# Altium PCB AMDDSP.PcbDoc (part 1 of 3)
Units mil, origin at the board's own origin, x right, y up, seen from the top; angles counter-clockwise.
Board outline 4736.22 x 5330.71 mil, 4 copper layers (Top Layer, GND, PWR, Bottom Layer); 286 components, 168 nets, 1027 pads, 408 vias.
Unrouted connection lines stored in the file: 126.
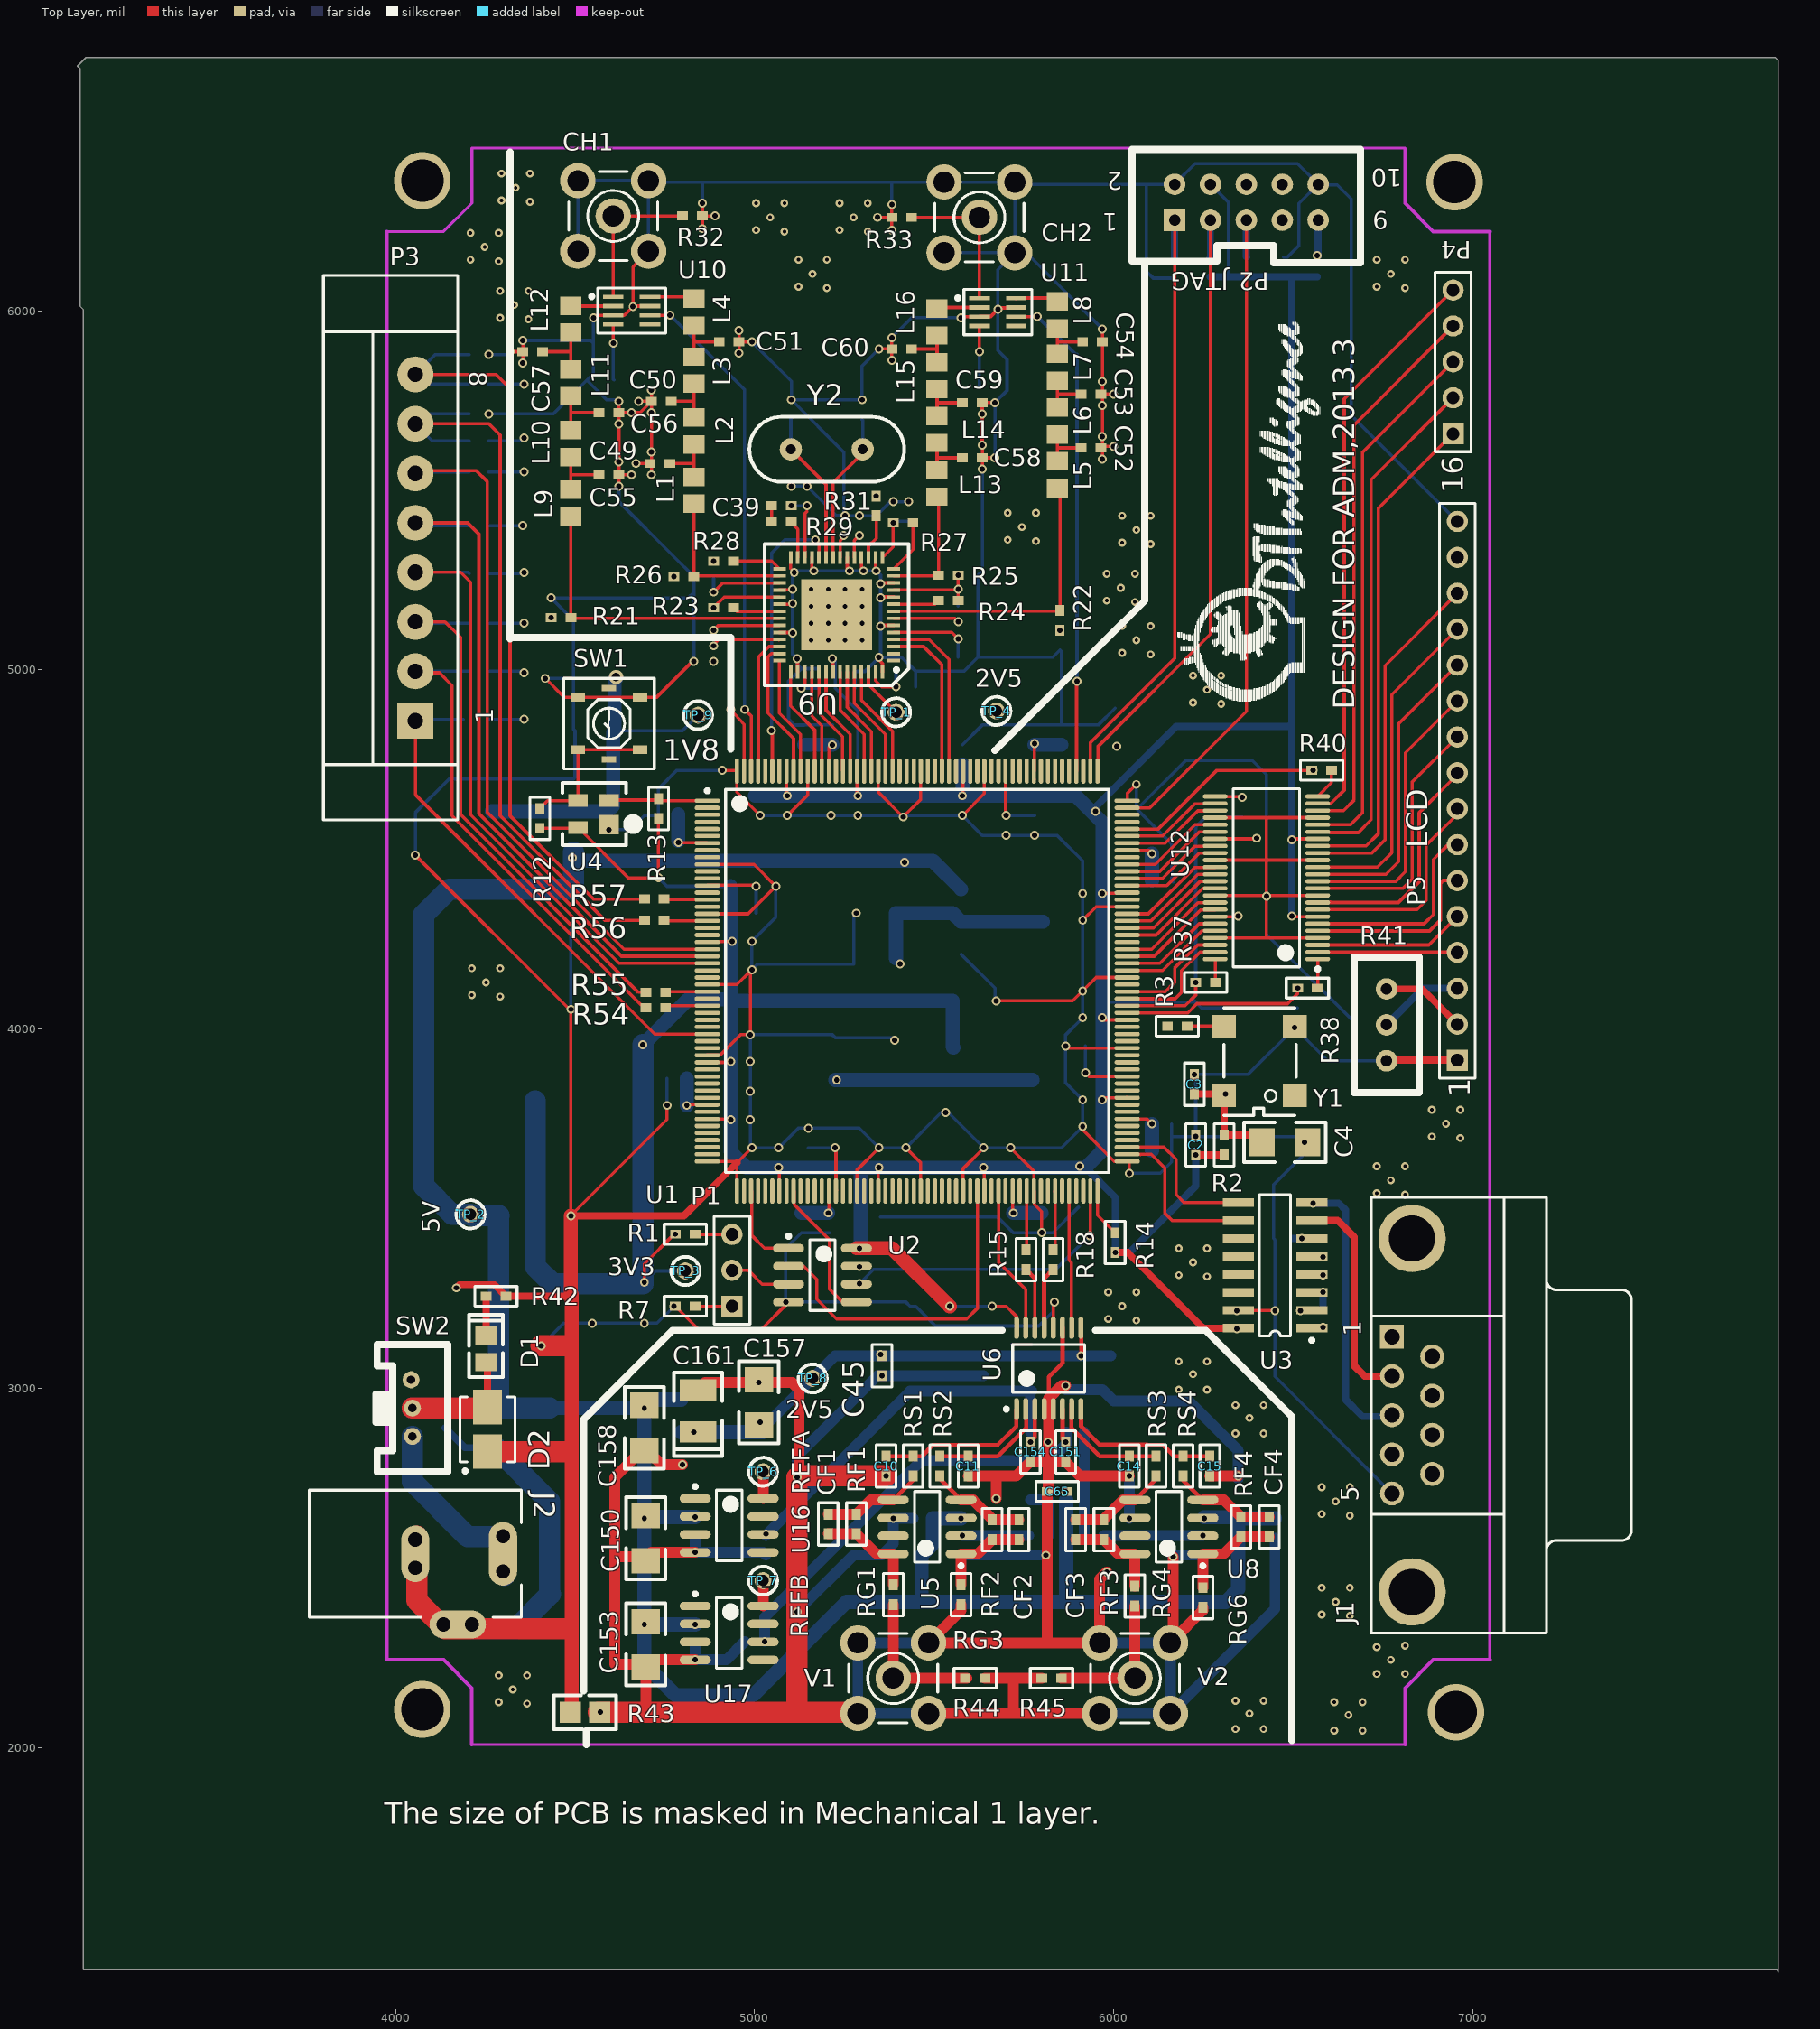
[diagram p0: Top Layer view]
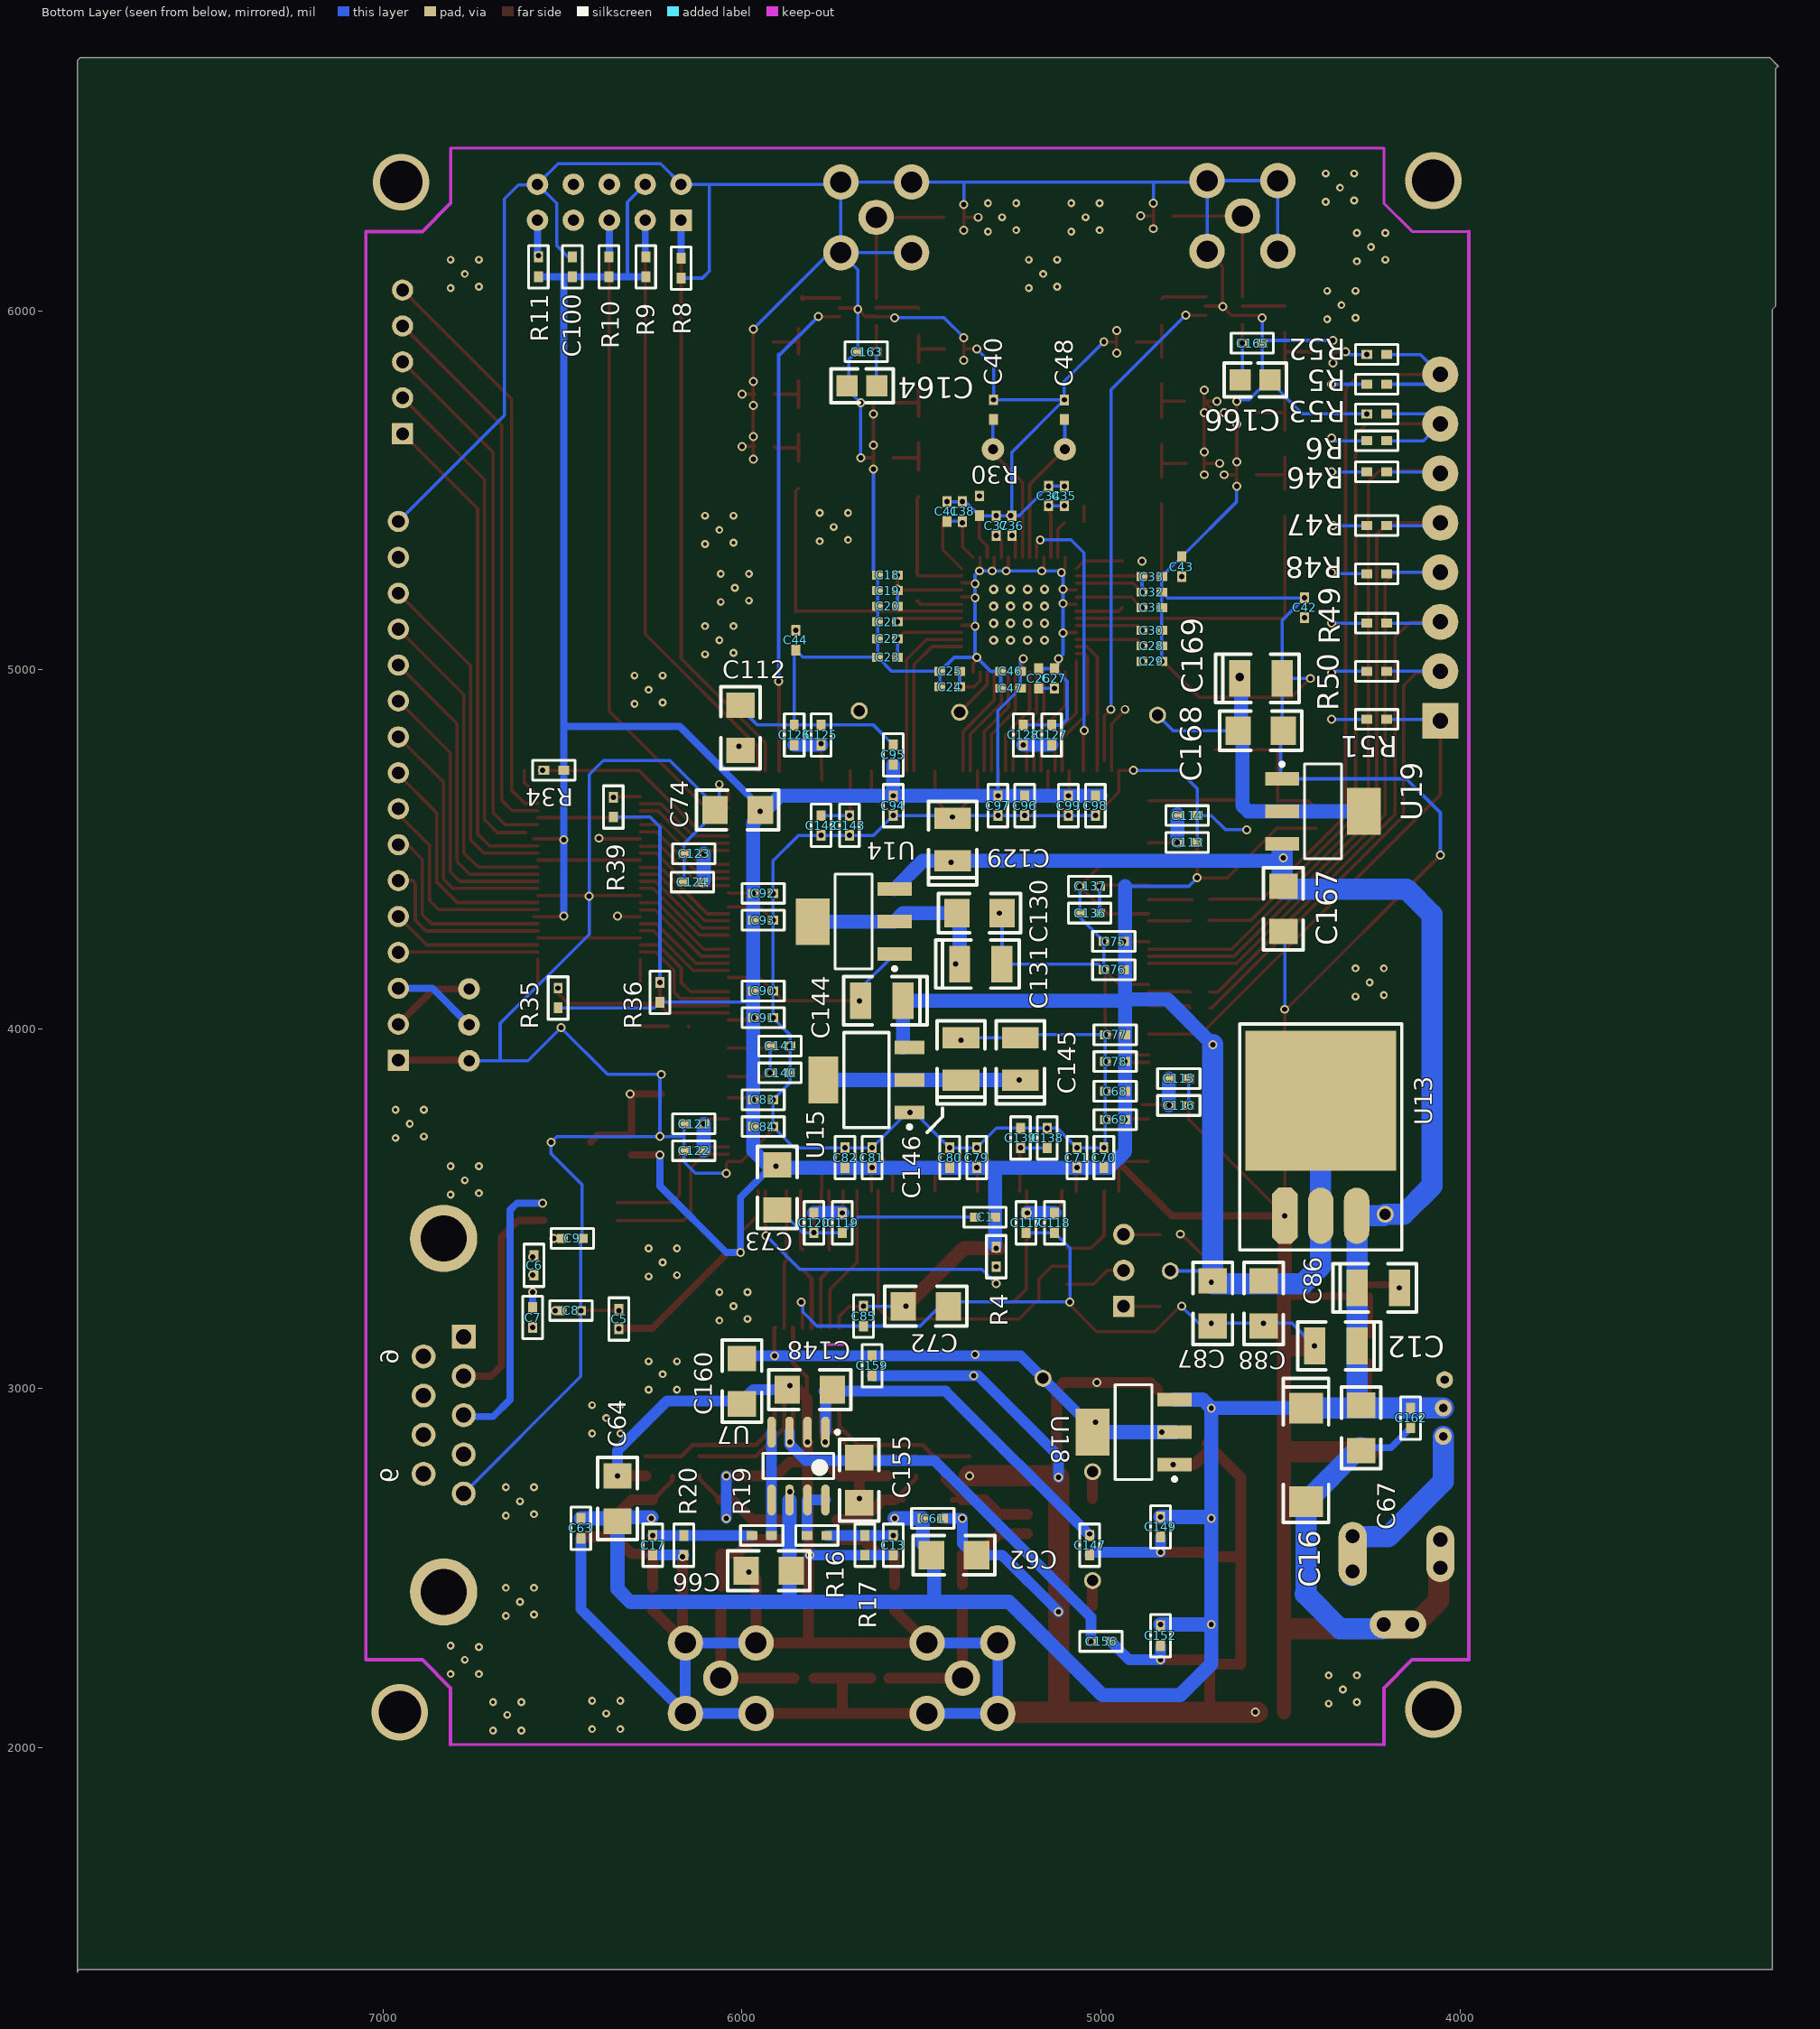
[diagram p1: Bottom Layer view, seen from below]
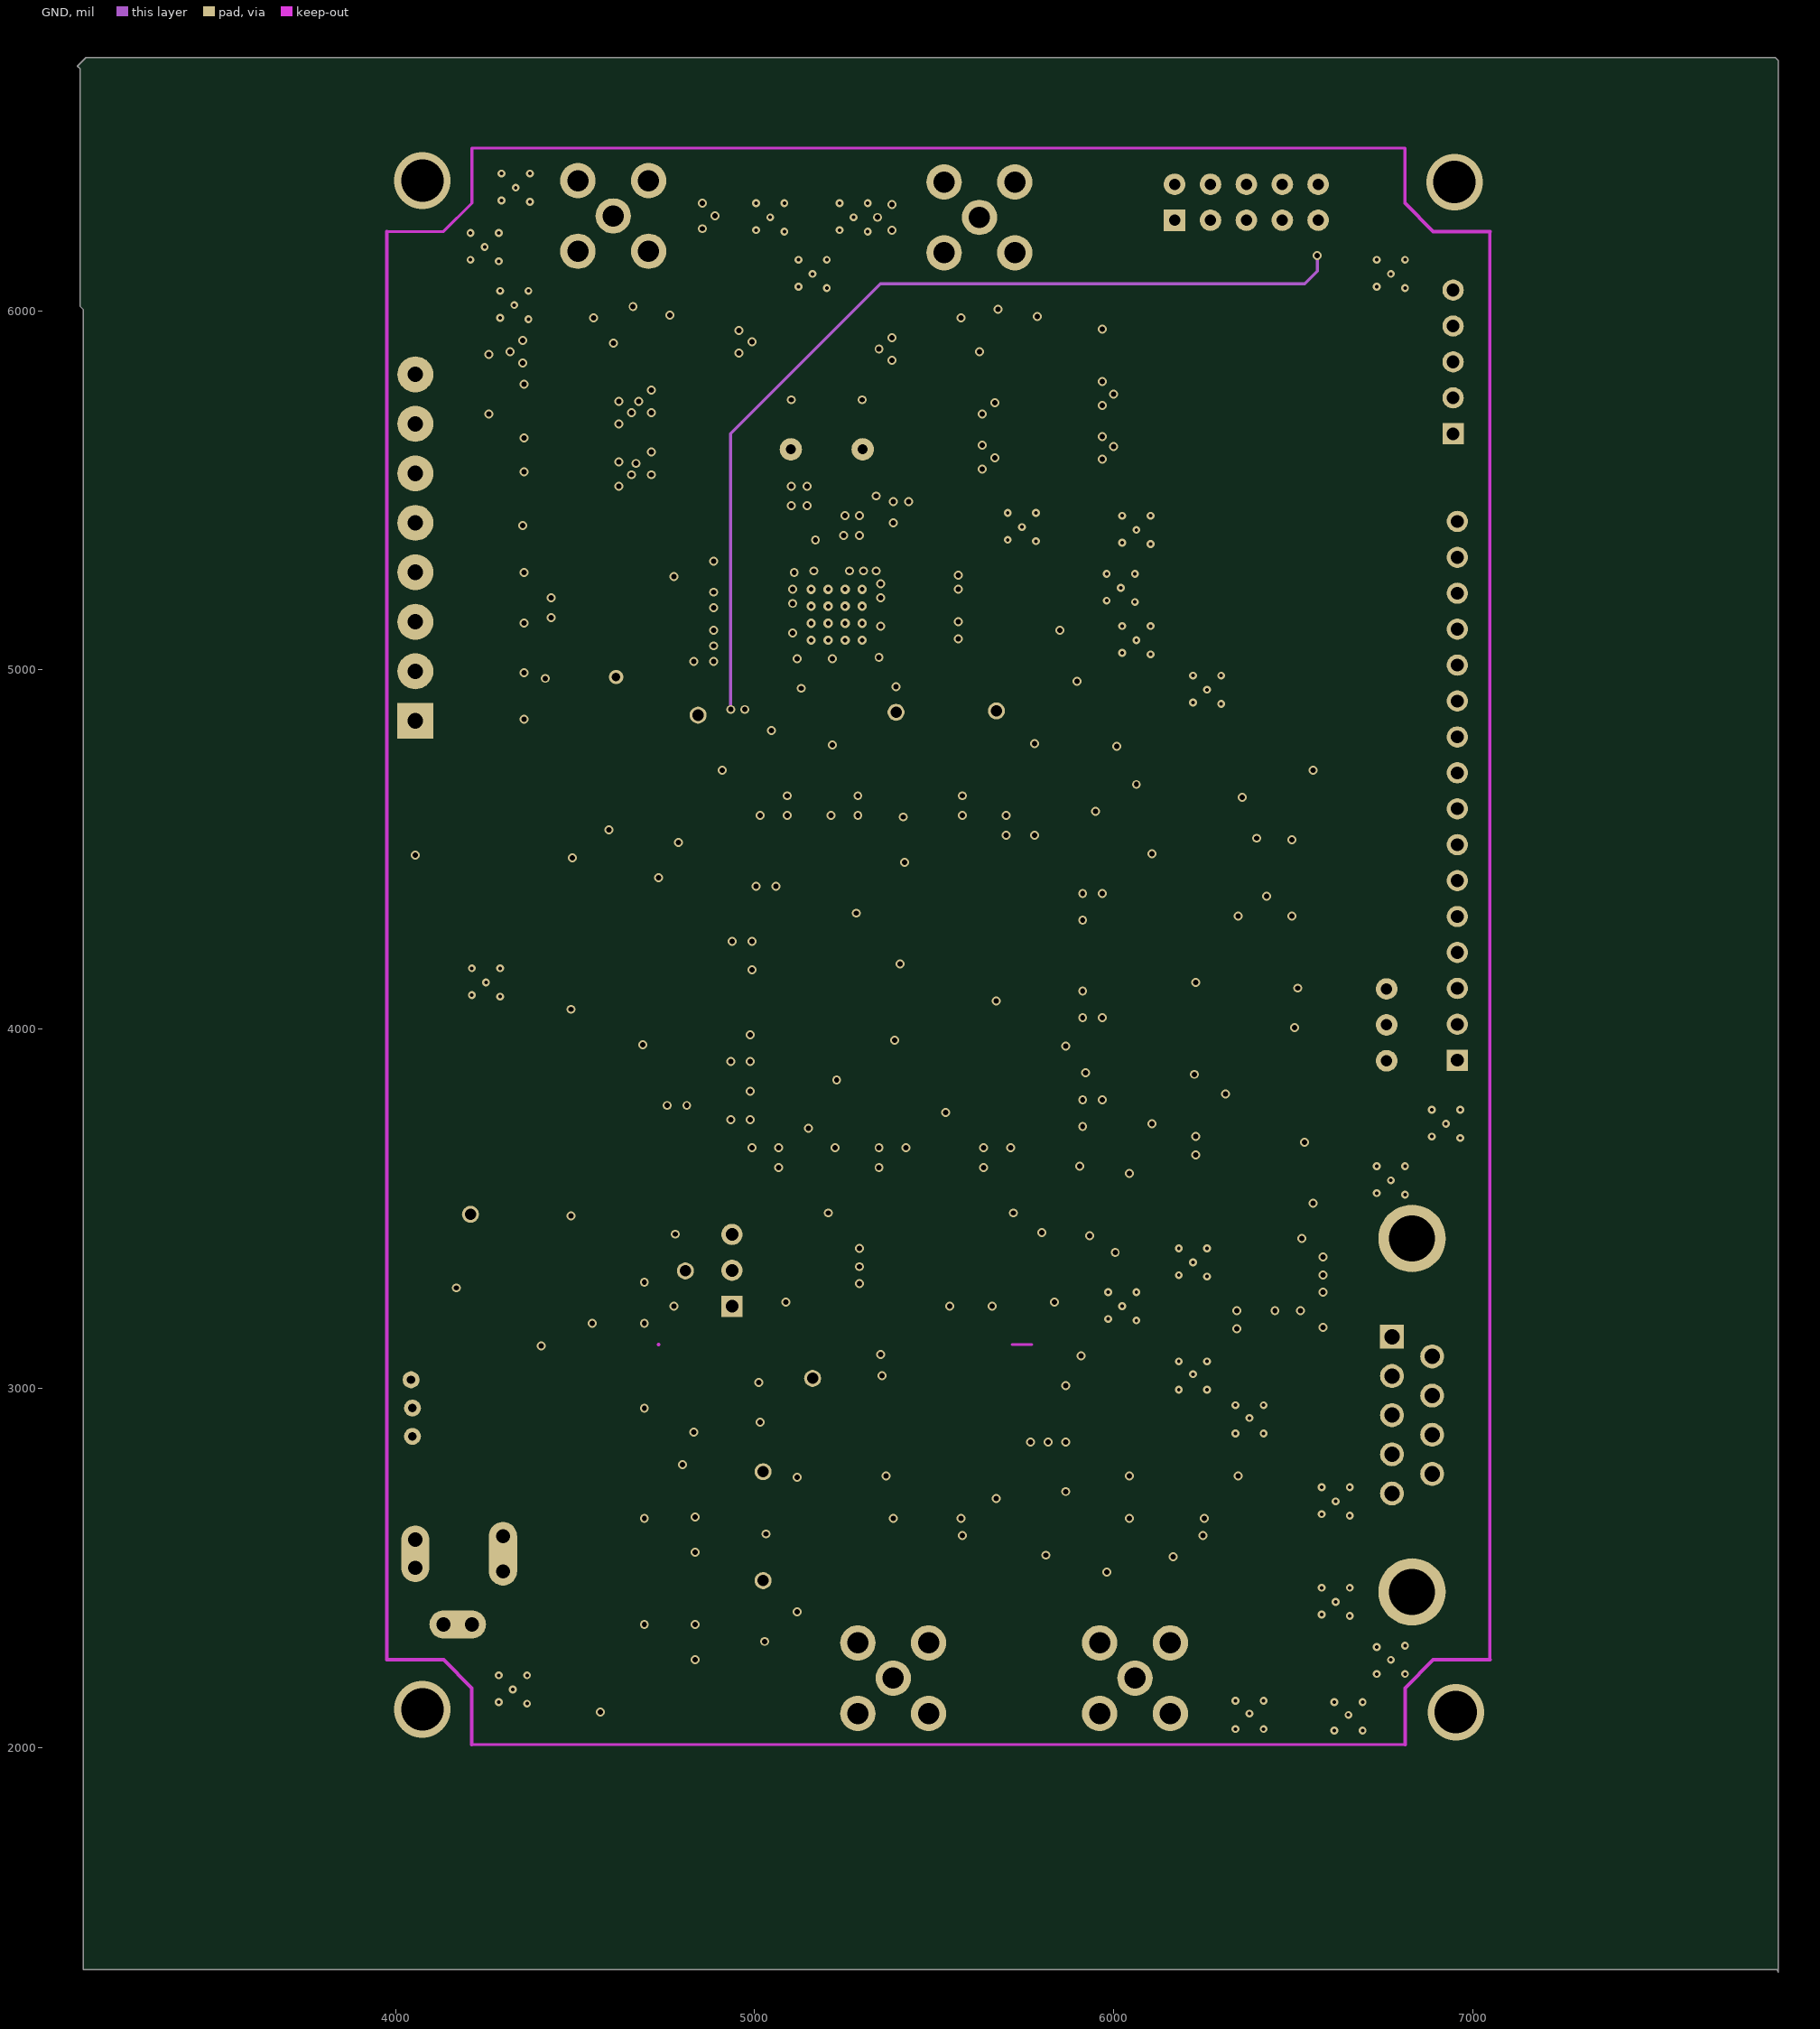
[diagram p2: GND]
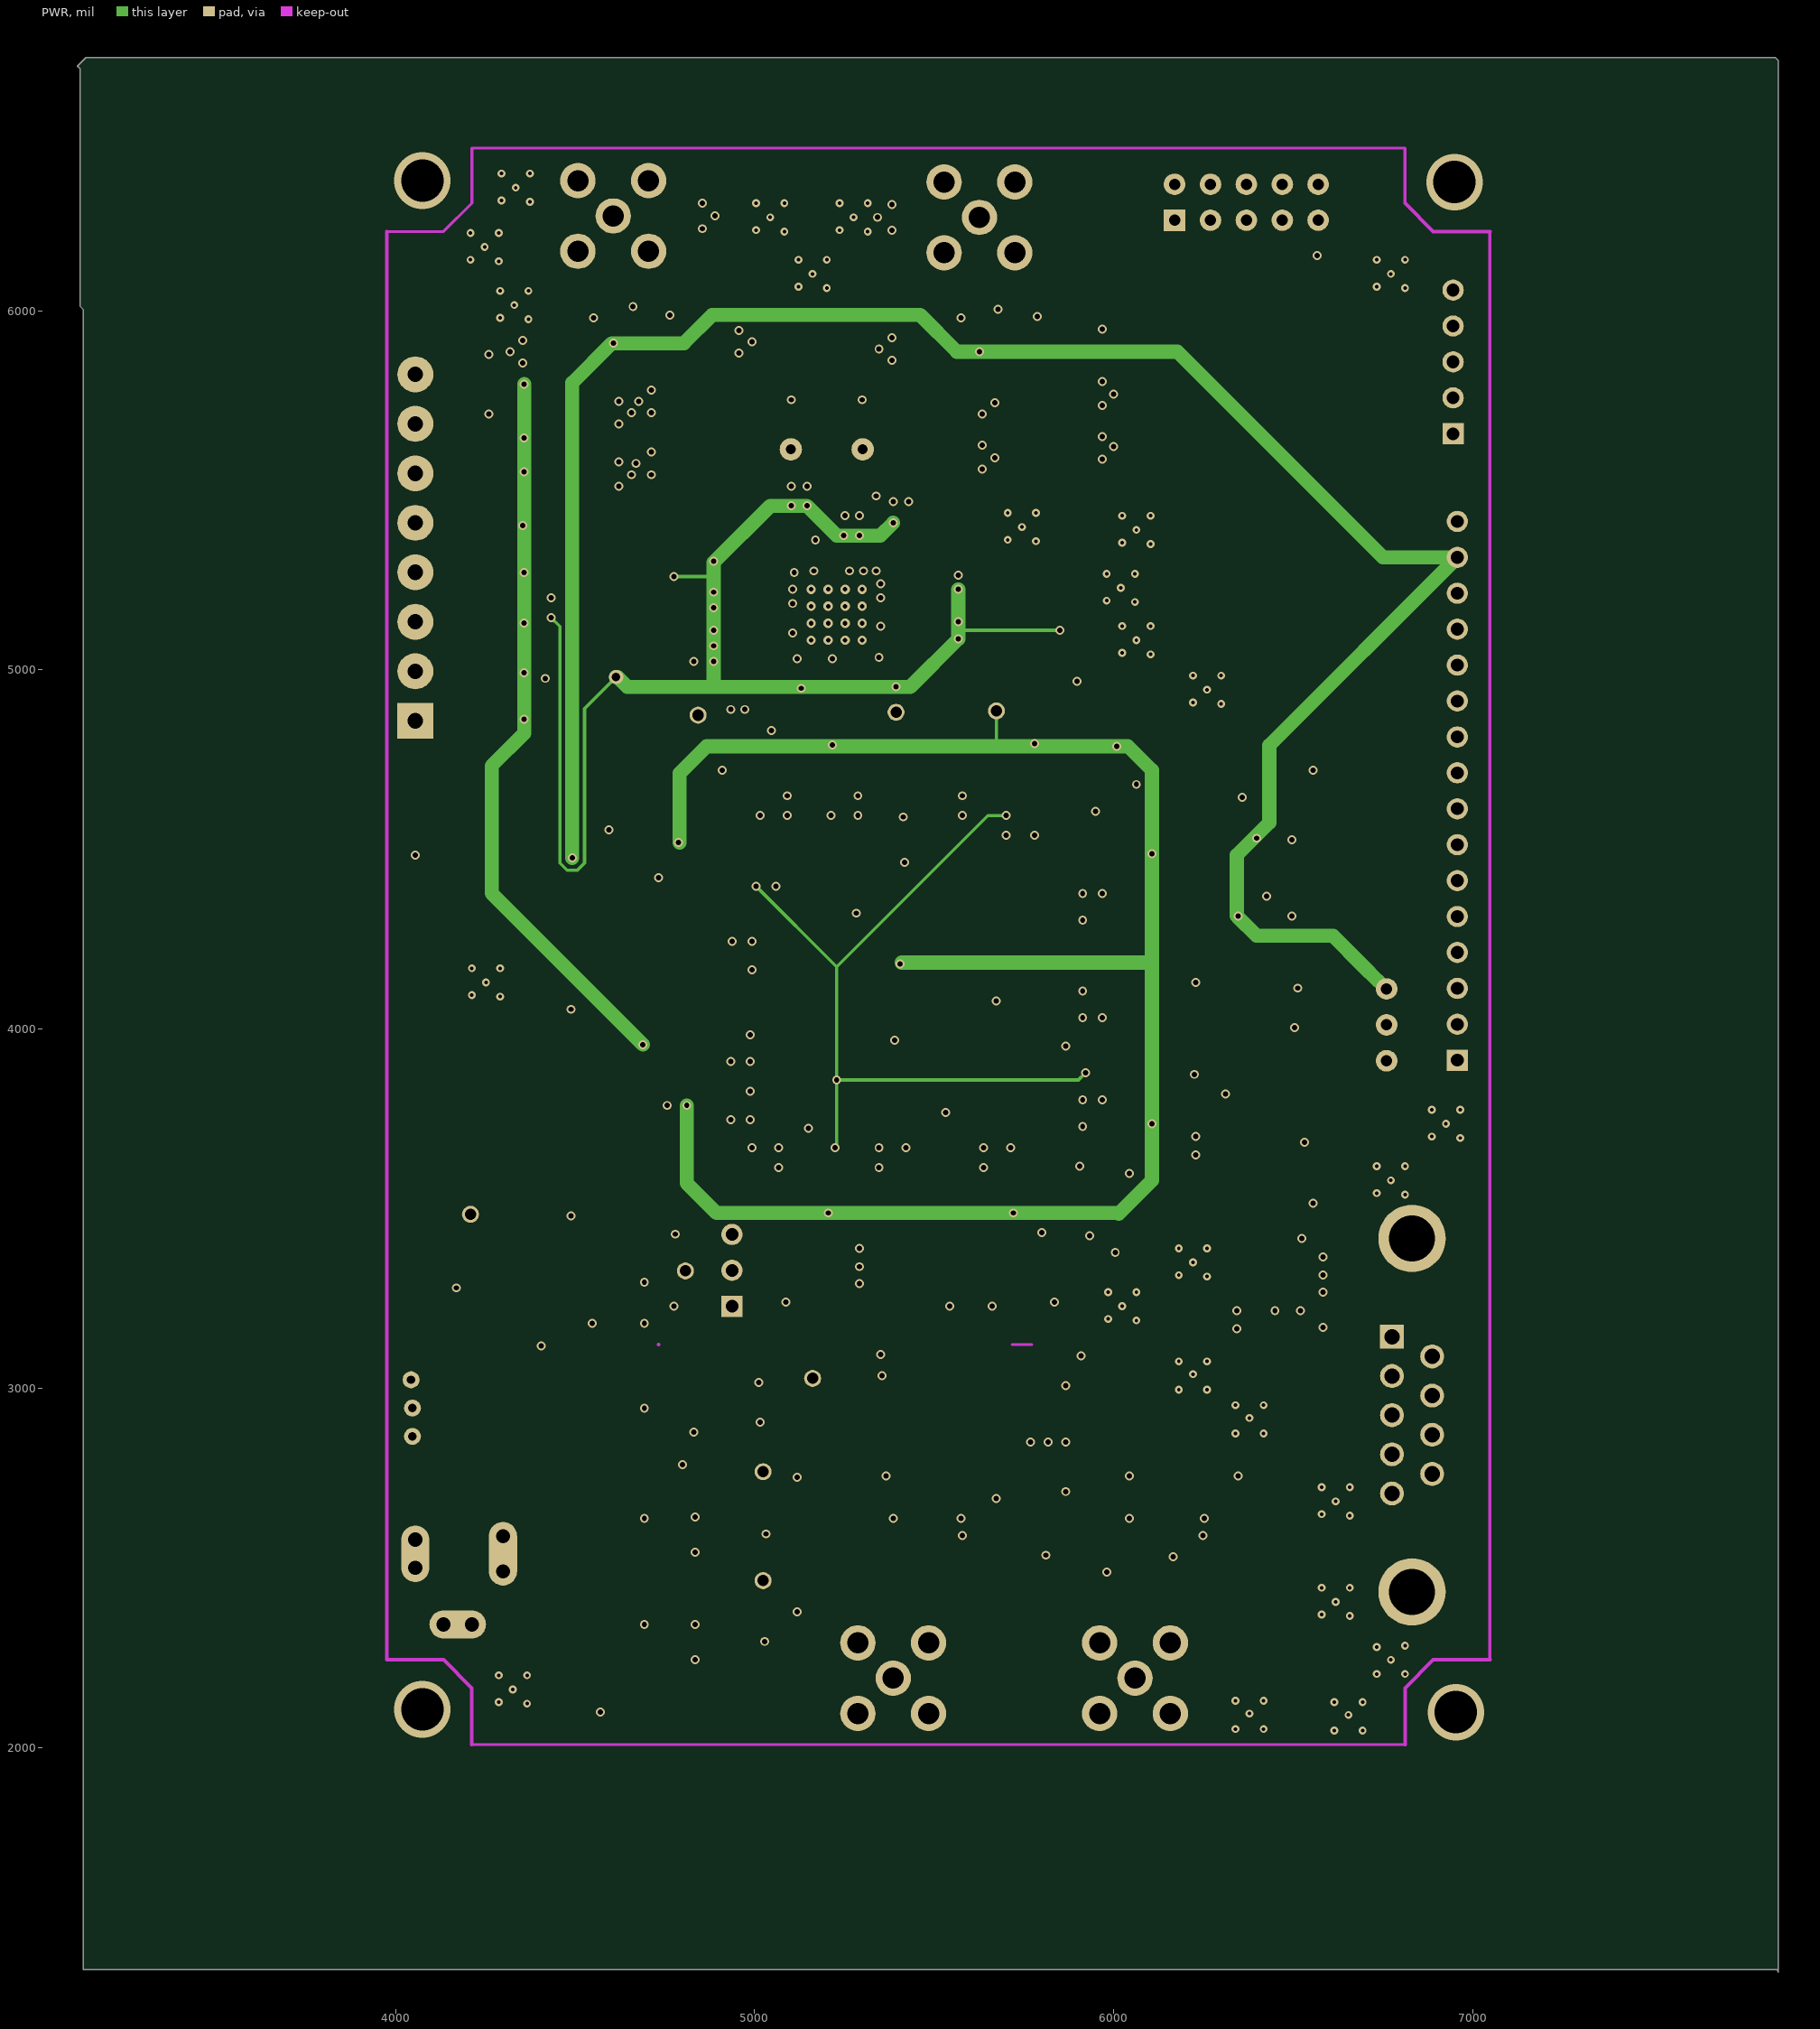
[diagram p3: PWR]

## Layer stack, top to bottom
Top Layer: signal copper 1.4
Dielectric: core 12.6, FR-4, Dk 4.8
GND: signal copper 1.4
Dielectric: prepreg 12.6, FR-4, Dk 4.8
PWR: signal copper 1.4
Dielectric: core 12.6, FR-4, Dk 4.8
Bottom Layer: signal copper 1.4

## Board outline
3122.05,6011.81 3129.92,6003.94 3129.92,1381.89 7846.46,1381.89 7850.39,1374.02 7850.39,6696.85 7842.52,6704.72 3137.8,6704.72 3114.17,6681.1 3122.05,6673.23

## Design rules (kind name [scope] priority, off if disabled: settings)
Clearance U9_Clearance [(InComponent('U9'))] p1: gap=9
Clearance Clearance_2 [(InComponent('U12'))] p2: gap=7
Clearance Clearance_1 [(InComponent('U1'))] p3: gap=7.87
Clearance [All] p4: gap=10
FabricationTestPointUsage TestPointUsage [All] p1: valid=0 allowmultiple=FALSE
FabricationTestpoint Testpoint [All] p1: side=3 testpointundercomponent=TRUE minsize=40 maxsize=100 preferedsize=60 minholesize=0 maxholesize=40 preferedholesize=32 testpointgrid=1 allowsidetop=TRUE allowsidebottom=TRUE usegrid=TRUE gridtolerance=0.01
HoleSize [All] p1: absolutevalues=TRUE maxlimit=148.03 minlimit=0 maxpercent=80.000 minpercent=20.000
MinimumSolderMaskSliver U10_MSM [(InComponent('U10'))] p1: minsoldermaskwidth=5
MinimumSolderMaskSliver U11_MSM [(InComponent('U11'))] p2: minsoldermaskwidth=5
MinimumSolderMaskSliver DDS_MinimumSolderMask [(InComponent('U9'))] p3: minsoldermaskwidth=1
MinimumSolderMaskSliver MinimumSolderMaskSliver_1 [(InComponent('U6'))] p4: minsoldermaskwidth=1
MinimumSolderMaskSliver 74LVCH16T_MiniumSolderMask [(InComponent('U12'))] p5: minsoldermaskwidth=10
MinimumSolderMaskSliver AD7356_MinimumSolderMask [(InComponent('U6'))] p6: minsoldermaskwidth=3.54
MinimumSolderMaskSliver [All] p7: minsoldermaskwidth=10
PolygonConnect [All] p1: connectstyle=Relief reliefconductorwidth=10 reliefentries=4 polygonreliefangle="90 Angle"
RoutingVias [All] p1: holewidth=28 width=50 viastyle="Through Hole" minholewidth=10 minwidth=22 maxholewidth=118.11 maxwidth=157.48
ShortCircuit [All] p1: allowed=TRUE
SilkscreenOverComponentPads [All] p1: minsilkscreentomaskgap=10
SolderMaskExpansion [All] p1: expansion=4
Width [All] p1: maxlimit=100 minlimit=9 preferedwidth=30
22 further rules are at their usual default settings.

## Classes and differential pairs
component class SH10-ASSI: U1 U?
component class SH09-PWR2: C45 C147 C148 C149 C150 C151 C152 C153 C154 C155 C156 C157 C158 C159 C160 C161 C167 C168 C169 C172 C173 C180 C181 R43 R59 TP_6 TP_7 TP_8 TP_9 U16 U17 U18 U19
component class SH08-PWR1: C12 C16 C61 C62 C63 C64 C65 C66 C67 C68 C69 C70 C71 C72 C73 C74 C75 C76 C77 C78 C79 C80 C81 C82 C83 C84 C85 C86 C87 C88 C90 C91 C92 C93 C94 C95 C96 C97 C98 C99 C100 C112 C113 C114 C115 C116 C117 C118 C119 C120 C121 C122 C123 C124 C125 C126 C127 C128 C129 C130 C131 C136 C137 C138 C139 C140 C141 C142 C143 C144 C145 C146 C162 C163 C164 C165 C166 D1 D2 J2 R42 R58 SW2 TP_2 TP_3 TP_4 U13 U14 U15
component class SH06-UI: P4 P5 R34 R35 R36 R37 R38 R39 R40 R41 U12
component class SH05-DDS: C18 C19 C20 C21 C22 C23 C24 C25 C26 C27 C28 C29 C30 C31 C32 C33 C34 C35 C36 C37 C38 C39 C40 C41 C42 C43 C44 C46 C47 C48 C49 C50 C51 C52 C53 C54 C55 C56 C57 C58 C59 C60 CH1 CH2 L1 L2 L3 L4 L5 L6 L7 L8 L9 L10 L11 L12 L13 L14 L15 L16 R21 R22 R23 R24 R25 R26 R27 R28 R29 R30 R31 R32 R33 R54 R55 R56 R57 TP_1 U9 U10 U11 U? Y2
component class SH03-AD: C10 C11 C13 C14 C15 C17 CF1 CF2 CF3 CF4 PA PB R15 R16 R17 R18 R19 R20 R44 R45 RF1 RF2 RF3 RF4 RG1 RG3 RG4 RG6 RS1 RS2 RS3 RS4 U5 U6 U7 U8 V1 V2
component class SH02-PERI: C1 C2 C3 C4 C5 C6 C7 C8 C9 J1 P1 P2 P3 R1 R2 R3 R4 R5 R6 R7 R8 R9 R10 R11 R12 R13 R14 R46 R47 R48 R49 R50 R51 R52 R53 SW1 U2 U3 U4 U? Y1

## Components (designator, comment, footprint, x,y, rotation, side; value= is the part's Value field where it differs from the comment)
C1 "Cap,0.1uF/0603" 1608[0603] 5295.28,3476.38 r0 bottom
C2 "Cap,0.1uF/0603" 1608[0603] 6228.35,3649.61 r90 top
C3 "Cap,0.1uF/0603" 1608[0603] 6224.41,3818.9 r90 top
C4 "Cap Pol,10uF/25V,1206" 1206[3216] 6476.38,3685.04 r0 top
C5 "Cap,0.1uF/0603" 1608[0603] 6342.52,3165.35 r90 bottom
C6 "Cap,0.1uF/0603" 1608[0603] 6578.74,3314.96 r90 bottom
C7 "Cap,0.1uF/0603" 1608[0603] 6582.68,3224.41 r270 bottom
C8 "Cap,0.1uF/0603" 1608[0603] 6503.94,3216.54 r180 bottom
C9 "Cap,0.1uF/0603" 1608[0603] 6444.88,3417.32 r0 bottom
C10 "Cap,0.1uF/0603" 1608[0603] 5366.14,2811.02 r270 top
C11 "Cap,0.1uF/0603" 1608[0603] 5594.49,2811.02 r270 top
C12 "Cap Pol,47uF/25V,1210" 1210[3528] 4346.46,3118.11 r0 bottom
C13 "Cap,0.1uF/0603" 1608[0603] 5578.74,2590.55 r270 bottom
C14 "Cap,0.1uF/0603" 1608[0603] 6043.31,2811.02 r270 top
C15 "Cap,0.1uF/0603" 1608[0603] 6267.72,2811.02 r270 top
C16 "Cap Pol,150uF/25V,7343" 7343 4429.13,2944.88 r270 bottom
C17 "Cap,0.1uF/0603" 1608[0603] 6248.03,2590.55 r270 bottom
C18 "Cap,0.1uF/0603" "1608[0603] - NOTOPOVERLAY" 5566.93,5263.78 r0 bottom
C19 "Cap,0.1uF/0603" "1608[0603] - NOTOPOVERLAY" 5566.93,5220.47 r0 bottom
C20 "Cap,0.1uF/0603" "1608[0603] - NOTOPOVERLAY" 5566.93,5177.17 r0 bottom
C21 "Cap,0.1uF/0603" "1608[0603] - NOTOPOVERLAY" 5566.93,5133.86 r0 bottom
C22 "Cap,0.1uF/0603" "1608[0603] - NOTOPOVERLAY" 5566.93,5086.61 r0 bottom
C23 "Cap,0.1uF/0603" "1608[0603] - NOTOPOVERLAY" 5566.93,5035.43 r0 bottom
C24 "Cap,0.1uF/0603" "1608[0603] - NOTOPOVERLAY" 5393.7,4952.76 r0 bottom
C25 "Cap,0.1uF/0603" "1608[0603] - NOTOPOVERLAY" 5393.7,4996.06 r0 bottom
C26 "Cap,0.1uF/0603" "1608[0603] - NOTOPOVERLAY" 5173.23,4948.82 r90 bottom
C27 "Cap,0.1uF/0603" "1608[0603] - NOTOPOVERLAY" 5129.92,4948.82 r90 bottom
C28 "Cap,0.1uF/0603" "1608[0603] - NOTOPOVERLAY" 4885.83,5066.93 r180 bottom
C29 "Cap,0.1uF/0603" "1608[0603] - NOTOPOVERLAY" 4885.83,5023.62 r180 bottom
C30 "Cap,0.1uF/0603" "1608[0603] - NOTOPOVERLAY" 4885.83,5110.24 r180 bottom
C31 "Cap,0.1uF/0603" "1608[0603] - NOTOPOVERLAY" 4885.83,5173.23 r180 bottom
C32 "Cap,0.1uF/0603" "1608[0603] - NOTOPOVERLAY" 4885.83,5216.54 r180 bottom
C33 "Cap,0.1uF/0603" "1608[0603] - NOTOPOVERLAY" 4885.83,5259.84 r180 bottom
C34 "Cap,0.1uF/0603" "1608[0603] - NOTOPOVERLAY" 5145.67,5456.69 r90 bottom
C35 "Cap,0.1uF/0603" "1608[0603] - NOTOPOVERLAY" 5102.36,5456.69 r90 bottom
C36 "Cap,0.1uF/0603" "1608[0603] - NOTOPOVERLAY" 5248.03,5374.02 r90 bottom
C37 "Cap,0.1uF/0603" "1608[0603] - NOTOPOVERLAY" 5291.34,5374.02 r90 bottom
C38 "Cap,0.1uF/0603" "1608[0603] - NOTOPOVERLAY" 5385.83,5413.39 r90 bottom
C39 "Cap,680pF/0603" "1608[0603] - NOTOPOVERLAY" 5102.36,5456.69 r180 top
C40 "Cap,10pF/0603" "1608[0603] - NOTOPOVERLAY" 5299.21,5751.97 r270 bottom
C41 "Cap,0.1uF/0603" "1608[0603] - NOTOPOVERLAY" 5429.13,5413.39 r90 bottom
C42 "Cap,0.1uF/0603" "1608[0603] - NOTOPOVERLAY" 4433.07,5145.67 r90 bottom
C43 "Cap,0.1uF/0603" "1608[0603] - NOTOPOVERLAY" 4775.59,5259.84 r90 bottom
C44 "Cap,0.1uF/0603" "1608[0603] - NOTOPOVERLAY" 5850.39,5110.24 r270 bottom
C45 "Cap,0.1uF/0603" 1608[0603] 5354.33,3090.55 r270 top
C46 "Cap,0.1uF/0603" "1608[0603] - NOTOPOVERLAY" 5224.41,4996.06 r0 bottom
C47 "Cap,0.1uF/0603" "1608[0603] - NOTOPOVERLAY" 5224.41,4948.82 r0 bottom
C48 "Cap,10pF/0603" "1608[0603] - NOTOPOVERLAY" 5102.36,5696.85 r90 bottom
C49 "Cap,39.693pF/0603" "1608[0603] - NOTOPOVERLAY" 4763.78,5574.8 r180 top
C50 "Cap,63.662pF/0603" "1608[0603] - NOTOPOVERLAY" 4767.72,5748.03 r180 top
C51 "Cap,39.693pF/0603" "1608[0603] - NOTOPOVERLAY" 4901.57,5913.39 r0 top
C52 "Cap,39.693pF/0603" "1608[0603] - NOTOPOVERLAY" 5909.45,5618.11 r0 top
C53 "Cap,63.662pF/0603" "1608[0603] - NOTOPOVERLAY" 5909.45,5767.72 r0 top
C54 "Cap,39.693pF/0603" "1608[0603] - NOTOPOVERLAY" 5913.39,5913.39 r0 top
C55 "Cap,992.315pF/0603" "1608[0603] - NOTOPOVERLAY" 4566.93,5543.31 r0 top
C56 "Cap,1.592nF/0603" "1608[0603] - NOTOPOVERLAY" 4566.93,5716.54 r0 top
C57 "Cap,992.315pF/0603" "1608[0603] - NOTOPOVERLAY" 4409.45,5885.83 r180 top
C58 "Cap,992.315pF/0603" "1608[0603] - NOTOPOVERLAY" 5578.74,5590.55 r0 top
C59 "Cap,1.592nF/0603" "1608[0603] - NOTOPOVERLAY" 5578.74,5744.09 r0 top
C60 "Cap,992.315pF/0603" "1608[0603] - NOTOPOVERLAY" 5437.01,5893.7 r180 top
C61 "Cap,0.1uF/0603" 1608[0603] 5496.06,2637.8 r180 bottom
C62 "Cap Pol,10uF/25V,1206" 1206[3216] 5409.45,2535.43 r180 bottom
C63 "Cap,0.1uF/0603" 1608[0603] 6448.82,2637.8 r270 bottom
C64 "Cap Pol,10uF/25V,1206" 1206[3216] 6346.46,2692.91 r90 bottom
C65 "Cap,0.1uF/0603" 1608[0603] 5870.08,2712.6 r180 top
C66 "Cap Pol,10uF/25V,1206" 1206[3216] 5925.2,2492.13 r0 bottom
C67 "Cap Pol,10uF/25V,1206" 1206[3216] 4275.59,2889.76 r270 bottom
C68 "Cap,0.1uF/0603" 1608[0603] 4988.19,3826.77 r180 bottom
C69 "Cap,0.1uF/0603" 1608[0603] 4988.19,3748.03 r180 bottom
C70 "Cap,0.1uF/0603" 1608[0603] 4992.13,3669.29 r270 bottom
C71 "Cap,0.1uF/0603" 1608[0603] 5066.93,3669.29 r270 bottom
C72 "Cap Pol,10uF/25V,1206" 1206[3216] 5488.19,3228.35 r180 bottom
C73 "Cap Pol,10uF/25V,1206" 1206[3216] 5901.57,3559.06 r270 bottom
C74 "Cap Pol,10uF/25V,1206" 1206[3216] 6011.81,4610.24 r0 bottom
C75 "Cap,0.1uF/0603" 1608[0603] 4992.13,4244.09 r180 bottom
C76 "Cap,0.1uF/0603" 1608[0603] 4992.13,4165.35 r180 bottom
C77 "Cap,0.1uF/0603" 1608[0603] 4988.19,3984.25 r180 bottom
C78 "Cap,0.1uF/0603" 1608[0603] 4988.19,3909.45 r180 bottom
C79 "Cap,0.1uF/0603" 1608[0603] 5346.46,3669.29 r270 bottom
C80 "Cap,0.1uF/0603" 1608[0603] 5421.26,3669.29 r270 bottom
C81 "Cap,0.1uF/0603" 1608[0603] 5637.8,3669.29 r270 bottom
C82 "Cap,0.1uF/0603" 1608[0603] 5712.6,3669.29 r270 bottom
C83 "Cap,0.1uF/0603" 1608[0603] 5913.39,3803.15 r0 bottom
C84 "Cap,0.1uF/0603" 1608[0603] 5913.39,3728.35 r0 bottom
C85 "Cap,0.1uF/0603" 1608[0603] 5661.42,3173.23 r90 bottom
C86 "Cap Pol,100uF/25V,1210" 1210[3528] 4228.35,3279.53 r180 bottom
C87 "Cap Pol,10uF/25V,1206" 1206[3216] 4688.98,3236.22 r270 bottom
C88 "Cap Pol,10uF/25V,1206" 1206[3216] 4547.24,3236.22 r270 bottom
C90 "Cap,0.1uF/0603" 1608[0603] 5913.39,4106.3 r0 bottom
C91 "Cap,0.1uF/0603" 1608[0603] 5913.39,4031.5 r0 bottom
C92 "Cap,0.1uF/0603" 1608[0603] 5913.39,4377.95 r0 bottom
C93 "Cap,0.1uF/0603" 1608[0603] 5913.39,4303.15 r0 bottom
C94 "Cap,0.1uF/0603" 1608[0603] 5578.74,4594.49 r90 bottom
C95 "Cap,0.1uF/0603" 1608[0603] 5578.74,4791.34 r270 bottom
C96 "Cap,0.1uF/0603" 1608[0603] 5212.6,4594.49 r90 bottom
C97 "Cap,0.1uF/0603" 1608[0603] 5287.4,4594.49 r90 bottom
C98 "Cap,0.1uF/0603" 1608[0603] 5015.75,4594.49 r90 bottom
C99 "Cap,0.1uF/0603" 1608[0603] 5090.55,4594.49 r90 bottom
C100 "Cap,0.1uF/0603" 1608[0603] 6472.44,6149.61 r270 bottom
C112 "Cap Pol,10uF/25V,1206" 1206[3216] 6003.94,4838.58 r90 bottom
C113 "Cap,0.1uF/0603" 1608[0603] 4732.28,4519.69 r0 bottom
C114 "Cap,0.1uF/0603" 1608[0603] 4732.28,4594.49 r0 bottom
C115 "Cap,0.1uF/0603" 1608[0603] 4755.91,3862.2 r0 bottom
C116 "Cap,0.1uF/0603" 1608[0603] 4755.91,3787.4 r0 bottom
C117 "Cap,0.1uF/0603" 1608[0603] 5208.66,3433.07 r90 bottom
C118 "Cap,0.1uF/0603" 1608[0603] 5129.92,3433.07 r90 bottom
C119 "Cap,0.1uF/0603" 1608[0603] 5720.47,3433.07 r90 bottom
C120 "Cap,0.1uF/0603" 1608[0603] 5799.21,3433.07 r90 bottom
C121 "Cap,0.1uF/0603" 1608[0603] 6161.42,3736.22 r180 bottom
C122 "Cap,0.1uF/0603" 1608[0603] 6161.42,3661.42 r180 bottom
C123 "Cap,0.1uF/0603" 1608[0603] 6161.42,4488.19 r180 bottom
C124 "Cap,0.1uF/0603" 1608[0603] 6165.35,4409.45 r180 bottom
C125 "Cap,0.1uF/0603" 1608[0603] 5779.53,4846.46 r270 bottom
C126 "Cap,0.1uF/0603" 1608[0603] 5854.33,4846.46 r270 bottom
C127 "Cap,0.1uF/0603" 1608[0603] 5137.8,4846.46 r270 bottom
C128 "Cap,0.1uF/0603" 1608[0603] 5216.54,4846.46 r270 bottom
C129 "Cap Pol,100uF/25V,1210" 1210[3528] 5413.39,4527.56 r90 bottom
C130 "Cap Pol,10uF/25V,1206" 1206[3216] 5338.58,4322.83 r180 bottom
C131 "Cap Pol,100uF/25V,1210" 1210[3528] 5334.65,4181.1 r180 bottom
C136 "Cap,0.1uF/0603" 1608[0603] 5059.06,4322.83 r180 bottom
C137 "Cap,0.1uF/0603" 1608[0603] 5059.06,4397.64 r180 bottom
C138 "Cap,0.1uF/0603" 1608[0603] 5149.61,3724.41 r270 bottom
C139 "Cap,0.1uF/0603" 1608[0603] 5224.41,3724.41 r270 bottom
C140 "Cap,0.1uF/0603" 1608[0603] 5866.14,3877.95 r0 bottom
C141 "Cap,0.1uF/0603" 1608[0603] 5866.14,3952.76 r0 bottom
C142 "Cap,0.1uF/0603" 1608[0603] 5779.53,4539.37 r90 bottom
C143 "Cap,0.1uF/0603" 1608[0603] 5700.79,4539.37 r90 bottom
C144 "Cap Pol,100uF/25V,1210" 1210[3528] 5610.24,4078.74 r0 bottom
C145 "Cap Pol,22uF/25V,1210" 1210[3528] 5224.41,3917.32 r90 bottom
C146 "Cap Pol,100uF/25V,1210" 1210[3528] 5389.76,3917.32 r90 bottom
C147 "Cap,0.1uF/0603" 1608[0603] 5031.5,2590.55 r270 bottom
C148 "Cap Pol,10uF/25V,1206" 1206[3216] 5811.02,2996.06 r0 bottom
C149 "Cap,0.1uF/0603" 1608[0603] 4834.65,2641.73 r270 bottom
C150 "Cap Pol,10uF/25V,1206" 1206[3216] 4696.85,2582.68 r270 top
C151 "Cap,0.1uF/0603" 1608[0603] 5866.14,2850.39 r270 top
C152 "Cap,0.1uF/0603" 1608[0603] 4834.65,2338.58 r270 bottom
C153 "Cap Pol,10uF/25V,1206" 1206[3216] 4696.85,2287.4 r270 top
C154 "Cap,0.1uF/0603" 1608[0603] 5767.72,2850.39 r270 top
C155 "Cap Pol,10uF/25V,1206" 1206[3216] 5673.23,2744.09 r270 bottom
C156 "Cap,0.1uF/0603" 1608[0603] 5027.56,2295.28 r180 bottom
C157 "Cap Pol,10uF/25V,1206" 1206[3216] 5011.81,2960.63 r90 top
C158 "Cap Pol,10uF/25V,1206" 1206[3216] 4692.91,2889.76 r270 top
C159 "Cap,0.1uF/0603" 1608[0603] 5637.8,3090.55 r270 bottom
C160 "Cap Pol,10uF/25V,1206" 1206[3216] 6000,3019.68 r270 bottom
C161 "Cap Pol,100uF/25V,1210" 1210[3528] 4842.52,2937.01 r90 top
C162 "Cap,0.1uF/0603" 1608[0603] 4137.8,2944.88 r270 bottom
C163 "Cap,0.1uF/0603" 1608[0603] 5625.98,5885.83 r0 bottom
C164 "Cap,1uF/0805" 2012[0805] 5665.35,5791.34 r0 bottom
C165 "Cap,0.1uF/0603" 1608[0603] 4606.3,5909.45 r180 bottom
C166 "Cap,1uF/0805" 2012[0805] 4570.87,5807.09 r180 bottom
C167 "Cap Pol,10uF/25V,1206" 1206[3216] 4492.13,4334.65 r270 bottom
C168 "Cap Pol,10uF/25V,1206" 1206[3216] 4555.12,4830.71 r180 bottom
C169 "Cap Pol,100uF/25V,1210" 1210[3528] 4555.12,4976.38 r180 bottom
CF1 "Cap,39PF/0603" 1608[0603] 5204.72,2649.61 r270 top
CF2 "Cap,39PF/0603" 1608[0603] 5736.22,2633.86 r270 top
CF3 "Cap,39PF/0603" 1608[0603] 5893.7,2633.86 r270 top
CF4 "Cap,39PF/0603" 1608[0603] 6433.07,2641.73 r270 top
CH1 "SMB" SMB_V-RJ45 4606.3,6263.78 r0 top
CH2 "SMB" SMB_V-RJ45 5625.98,6259.84 r0 top
D1 "LED" "2012[0805] - LED" 4251.97,3110.24 r90 top
D2 "P6SMBJ10A" SMBJ10A_DIOM4336X24N 4255.91,2885.83 r90 top
J1 "D Connector 9" DSUB1.385-2H9 7204.72,2925.2 r270 top
J2 "5V INPUT" IF_KLD-0202 3759.84,2539.37 r0 top
L1 "Inductor,L0805,35.415nH" "2012[0805] - NOTOPOVERLAY" 4830.71,5500 r90 top
L2 "Inductor,L0805,143.394nH" "2012[0805] - NOTOPOVERLAY" 4830.71,5665.35 r90 top
L3 "Inductor,L0805,143.394nH" "2012[0805] - NOTOPOVERLAY" 4830.71,5834.65 r90 top
L4 "Inductor,L0805,35.415nH" "2012[0805] - NOTOPOVERLAY" 4830.71,5996.06 r90 top
L5 "Inductor,L0805,35.415nH" "2012[0805] - NOTOPOVERLAY" 5842.52,5543.31 r90 top
L6 "Inductor,L0805,143.394nH" "2012[0805] - NOTOPOVERLAY" 5842.52,5692.91 r90 top
L7 "Inductor,L0805,143.394nH" "2012[0805] - NOTOPOVERLAY" 5842.52,5842.52 r90 top
L8 "Inductor,L0805,35.415nH" "2012[0805] - NOTOPOVERLAY" 5842.52,5988.19 r90 top
L9 "Inductor,L0805,885.383nH" "2012[0805] - NOTOPOVERLAY" 4488.19,5464.57 r90 top
L10 "Inductor,L0805,3.585uH" "2012[0805] - NOTOPOVERLAY" 4488.19,5629.92 r90 top
L11 "Inductor,L0805,3.585uH" "2012[0805] - NOTOPOVERLAY" 4488.19,5799.21 r90 top
L12 "Inductor,L0805,885.383nH" "2012[0805] - NOTOPOVERLAY" 4488.19,5976.38 r90 top
L13 "Inductor,L0805,885.383nH" "2012[0805] - NOTOPOVERLAY" 5507.87,5519.69 r90 top
L14 "Inductor,L0805,3.585uH" "2012[0805] - NOTOPOVERLAY" 5507.87,5669.29 r90 top
L15 "Inductor,L0805,3.585uH" "2012[0805] - NOTOPOVERLAY" 5507.87,5818.9 r90 top
L16 "Inductor,L0805,885.383nH" "2012[0805] - NOTOPOVERLAY" 5507.87,5968.5 r90 top
P1 "牛角头 5X2" HDR1X3 4937.01,3228.35 r90 top
P2 "Header 5X2" "10PIN - JTAG" 6169.29,6251.97 r0 top
P3 "绿色端子 8PIN,3.5mm间距" 8PIN 4055.12,4858.27 r90 top
P4 "Header 5" HDR1X5 6944.88,5657.48 r90 top
P5 "Header 16" HDR1X16 6956.69,3913.39 r90 top
R1 "Res,4.7K/0603" 1608[0603] 4834.65,3429.13 r180 top
R2 "Res,2.2R/0603" 1608[0603] 6307.09,3649.61 r90 top
R3 "Res,2.2R/0603" 1608[0603] 6204.72,4007.87 r180 top
R4 "Res,4.7K/0603" 1608[0603] 5291.34,3338.58 r90 bottom
R5 "Res,10K/0603" 1608[0603] 4259.84,5795.28 r180 bottom
R6 "Res,10K/0603" 1608[0603] 4259.84,5637.8 r180 bottom
R7 "Res,4.7K/0603" 1608[0603] 4779.53,3228.35 r0 top
R8 "Res,1K/0603" 1608[0603] 6169.29,6145.67 r270 bottom
R9 "Res,1K/0603" 1608[0603] 6267.72,6149.61 r270 bottom
R10 "Res,1K/0603" 1608[0603] 6370.08,6149.61 r270 bottom
R11 "Res,1K/0603" 1608[0603] 6566.93,6149.61 r270 bottom
R12 "Res,10K/0603" 1608[0603] 4401.57,4614.17 r270 top
R13 "Res,10K/0603" 1608[0603] 4732.28,4586.61 r90 top
R14 "Res,10K/0603" 1608[0603] 6003.94,3377.95 r90 top
R15 "Res,0R/0603" 1608[0603] 5755.91,3330.71 r90 top
R16 "Res,10K/0603" 1608[0603] 5818.9,2590.55 r180 bottom
R17 "Res,10K/0603" 1608[0603] 5657.48,2535.43 r90 bottom
R18 "Res,0R/0603" 1608[0603] 5830.71,3330.71 r90 top
R19 "Res,10K/0603" 1608[0603] 5917.32,2590.55 r0 bottom
R20 "Res,10K/0603" 1608[0603] 6161.42,2535.43 r90 bottom
R21 "Res,50R/0603" "1608[0603] - NOTOPOVERLAY" 4488.19,5145.67 r180 top
R22 "Res,50R/0603" "1608[0603] - NOTOPOVERLAY" 5850.39,5110.24 r90 top
R23 "Res,50R/0603" "1608[0603] - NOTOPOVERLAY" 4940.94,5173.23 r180 top
R24 "Res,50R/0603" "1608[0603] - NOTOPOVERLAY" 5566.93,5192.91 r180 top
R25 "Res,50R/0603" "1608[0603] - NOTOPOVERLAY" 5566.93,5263.78 r180 top
R26 "Res,50R/0603" "1608[0603] - NOTOPOVERLAY" 4830.71,5259.84 r180 top
R27 "Res,50R/0603" "1608[0603] - NOTOPOVERLAY" 5385.83,5409.45 r0 top
R28 "Res,50R/0603" "1608[0603] - NOTOPOVERLAY" 4940.94,5303.15 r180 top
R29 "Res,0R/0603" "1608[0603] - NOTOPOVERLAY" 5047.24,5413.39 r0 top
R30 "Res,910R/0603" "1608[0603] - NOTOPOVERLAY" 5338.58,5484.25 r270 bottom
R31 "Res,1K/0805" "1608[0603] - NOTOPOVERLAY" 5338.58,5429.13 r90 top
R32 "Res,49R9/0603" "1608[0603] - NOTOPOVERLAY" 4799.21,6263.78 r0 top
R33 "Res,49R9/0603" "1608[0603] - NOTOPOVERLAY" 5437.01,6259.84 r180 top
R34 "Res,4.7K/0603" 1608[0603] 6551.18,4720.47 r180 bottom
R35 "Res,4.7K/0603" 1608[0603] 6511.81,4114.17 r270 bottom
R36 "Res,4.7K/0603" 1608[0603] 6228.35,4129.92 r270 bottom
R37 "Res,0R/0603" 1608[0603] 6228.35,4129.92 r0 top
R38 "Res,0R/0603" 1608[0603] 6511.81,4114.17 r0 top
R39 "Res,0R/0603" 1608[0603] 6358.27,4590.55 r90 bottom
R40 "Res,0R/0603" 1608[0603] 6551.18,4720.47 r0 top
R41 "Res Adj,20K" RES-ADJ 6759.84,4011.81 r90 top
R42 "Res,10K/0603" 1608[0603] 4307.09,3255.91 r180 top
R43 "Res,0R/0805" 2012[0805] 4527.56,2098.43 r180 top
R44 "Res,49R9/0603" 1608[0603] 5586.61,2192.91 r0 top
R45 "Res,49R9/0603" 1608[0603] 5854.33,2192.91 r180 top
R46 "Res,10K/0603" 1608[0603] 4259.84,5551.18 r180 bottom
R47 "Res,10K/0603" 1608[0603] 4259.84,5401.57 r180 bottom
R48 "Res,10K/0603" 1608[0603] 4259.84,5267.72 r180 bottom
R49 "Res,10K/0603" 1608[0603] 4259.84,5129.92 r180 bottom
R50 "Res,10K/0603" 1608[0603] 4259.84,4996.06 r180 bottom
R51 "Res,10K/0603" 1608[0603] 4259.84,4862.2 r180 bottom
R52 "Res,10K/0603,NoPoP" 1608[0603] 4204.72,5877.95 r0 bottom
R53 "Res,10K/0603,NoPoP" 1608[0603] 4204.72,5712.6 r0 bottom
R54 "Res,0R/0603" "1608[0603] - NOTOPOVERLAY" 4751.97,4059.06 r180 top
R55 "Res,0R/0603" "1608[0603] - NOTOPOVERLAY" 4751.97,4102.36 r180 top
R56 "Res,0R/0603" "1608[0603] - NOTOPOVERLAY" 4748.03,4303.15 r180 top
R57 "Res,0R/0603" "1608[0603] - NOTOPOVERLAY" 4748.03,4362.2 r180 top
RF1 "Res,499R/0603" 1608[0603] 5283.46,2649.61 r270 top
RF2 "Res,499R/0603" 1608[0603] 5661.42,2633.86 r270 top
RF3 "Res,499R/0603" 1608[0603] 5972.44,2633.86 r270 top
RF4 "Res,499R/0603" 1608[0603] 6354.33,2641.73 r270 top
RG1 "Res,499R/0603" 1608[0603] 5385.83,2452.76 r270 top
RG3 "Res,523R/0603" 1608[0603] 5574.8,2452.76 r270 top
RG4 "Res,499R/0603" 1608[0603] 6059.06,2448.82 r270 top
RG6 "Res,523R/0603" 1608[0603] 6248.03,2444.88 r270 top
RS1 "Res,33R/0603" 1608[0603] 5440.94,2811.02 r270 top
RS2 "Res,33R/0603" 1608[0603] 5515.75,2811.02 r270 top
RS3 "Res,33R/0603" 1608[0603] 6118.11,2811.02 r270 top
RS4 "Res,33R/0603" 1608[0603] 6192.91,2811.02 r270 top
SW1 "SW,EVQPLMA15_1" PUSHBUTTONSW 4594.49,4850.39 r90 top
SW2 "SW-12D09" SW_SD12D09 4047.24,2944.88 r90 top
TP_1 "TP_DDS_SYNC_CLK" MYTP 5393.7,4881.89 r90 top
TP_2 "5V" MYTP 4208.66,3484.25 r90 top
TP_3 "3V3" MYTP 4807.09,3326.77 r90 top
TP_4 "2V5" MYTP 5673.23,4885.83 r90 top
TP_6 "REFA" MYTP 5023.62,2767.72 r90 top
TP_7 "REFB" MYTP 5023.62,2464.57 r90 top
TP_8 "2V5" MYTP 5161.42,3027.56 r0 top
TP_9 "1V8" MYTP 4842.52,4874.02 r90 top
U1 "XC3S500E-4PQG208C" PQG208_N 5452.76,4133.86 r0 top
U2 "M25P80" SOIC127P600X175-8N 5188.98,3314.96 r0 top
U3 "MAX3232CSE" NSO16 6448.82,3342.52 r90 top
U4 "MAX811-EUS-T" SOT143 4551.18,4598.43 r90 top
U5 "AD8138" SOIC127P600X175-8N 5480.31,2614.17 r180 top
U6 "AD7356" TSOP65P640X120-16N 5818.9,3055.12 r90 top
U7 "OP727" SOIC127P600X175-8N 5842.52,2783.46 r270 bottom
U8 "AD8138" SOIC127P600X175-8N 6153.54,2614.17 r180 top
U9 "AD9959" CP-56 5228.35,5153.54 r180 top
U10 "SW_ADG619" SOT23D 4657.48,6000 r0 top
U11 "SW_ADG619" SOT23D 5677.17,5996.06 r0 top
U12 "BUS_74LVCH16T245-EP" TSSOP50P810X120-48N 6425.2,4421.26 r180 top
U13 "LM1117S-3.3" TO-263-3SMD 4488.19,3480.32 r180 bottom
U14 "AS1117-2.5" SOT223P700X180-4N 5688.98,4299.21 r0 bottom
U15 "FAN1112" SOT-223(FAN1112) 5653.54,3858.27 r0 bottom
U16 "ADR421" SOIC127P600X175-8N 4929.13,2618.11 r0 top
U17 "ADR421" SOIC127P600X175-8N 4929.13,2318.9 r0 top
U18 "LM1117-2V5" SOT223P700X180-4N 4909.45,2877.95 r0 bottom
U19 "LM1117-1V8" SOT223P700X180-4N 4381.89,4606.3 r180 bottom
V1 "SMB" SMB_V-RJ45 5385.83,2192.91 r0 top
V2 "SMB" SMB_V-RJ45 6059.06,2192.91 r0 top
Y1 "XTAL_50M" CRY_4PIN_50M 6503.94,3814.96 r90 top
Y2 "XTAL_25M" XTAL_DIP 5200.79,5614.17 r0 top

## Footprints (in the part's own frame and the unit in brackets; to place one, negate y for a bottom-side part, rotate by r counter-clockwise, add the part's x,y. Pads: shape width x height; smd on the part's side, far side on the other; paste and mask are expansions set on the pad)
8PIN [mm] "ÂÌÉ«¶"
  rect 2.54x2.54 hole 1.1: 1(0,0)
  round 2.54 hole 1.1: 2(3.5,0) 3(7,0) 4(10.5,0) 5(14,0) 6(17.5,0) 7(21,0) 8(24.5,0)
  silkscreen extent -7,-3 31.5,6.5
"10PIN - JTAG" [mil] "JTAG"
  rect 60x60 hole 31.5: 1(0,0)
  round 60 hole 31.5: 2(0,100) 3(100,0) 4(100,100) 5(200,0) 6(200,100) 7(300,0) 8(300,100) 9(400,0) 10(400,100)
  silkscreen extent -118,-118 518,197
1206[3216] [mm] "Chip Resistor; Body 3.2 x 1.6 mm (LxW typ)"
  rect 1.8x2 smd: 1(-1.6,0) 2(1.6,0)
  silkscreen extent -2.9,-1.4 2.9,1.4, body extent -2.2,-0.8 2.2,0.8, height 3
1210[3528] [mm] "B型钽电容"
  rect 1.5x2.6 smd: 1(-1.5,0) 2(1.5,0)
  silkscreen extent -3.2,-1.7 2.7,1.7
1608[0603] [mil]
  rect 30x25 smd: 1(0,0) 2(55,0)
  silkscreen extent -31,-28 87,28
"1608[0603] - NOTOPOVERLAY" [mil]
  rect 30x25 smd: 1(0,0) 2(55,0)
2012[0805] [mm] "Chip Resistor; Body 2.0 x 1.3 mm (LxW typ)"
  rect 1.5x1.5 smd: 1(-1.05,0) 2(1.05,0)
  silkscreen extent -2.2,-1.2 2.2,1.2, body extent -1.8,-0.7 1.8,0.7, height 3
"2012[0805] - LED" [mm] "Chip Resistor; Body 2.0 x 1.3 mm (LxW typ)"
  rect 1.3x1.5 smd: 1(-0.95,0) 2(0.95,0)
  silkscreen extent -2,-1.2 2.4,1.2
"2012[0805] - NOTOPOVERLAY" [mm] "Chip Resistor; Body 2.0 x 1.3 mm (LxW typ)"
  rect 1.3x1.5 smd: 1(-0.95,0) 2(0.95,0)
7343 [mm] "D型钽电容"
  rect 2.16x2.41 smd: 1(0,0) 2(6.61,0)
  silkscreen extent -2.1,-1.6 8.1,1.6
CP-56 [mm] "CP- 56-Leads, Body 7.8x7.8mm (max), Pitch 0.50mm, IPC High Density"
  rect 0.9x0.25 smd: 1(-4.05,3.25) 2(-4.05,2.75) 3(-4.05,2.25) 4(-4.05,1.75) 5(-4.05,1.25) 6(-4.05,0.75) 7(-4.05,0.25) 8(-4.05,-0.25) 9(-4.05,-0.75) 10(-4.05,-1.25) 11(-4.05,-1.75) 12(-4.05,-2.25) 13(-4.05,-2.75) 14(-4.05,-3.25) 29(4.05,-3.25) 30(4.05,-2.75) 31(4.05,-2.25) 32(4.05,-1.75) 33(4.05,-1.25) 34(4.05,-0.75) 35(4.05,-0.25) 36(4.05,0.25) 37(4.05,0.75) 38(4.05,1.25) 39(4.05,1.75) 40(4.05,2.25) 41(4.05,2.75) 42(4.05,3.25)
  rect 0.25x0.9 smd: 15(-3.25,-4.05) 16(-2.75,-4.05) 17(-2.25,-4.05) 18(-1.75,-4.05) 19(-1.25,-4.05) 20(-0.75,-4.05) 21(-0.25,-4.05) 22(0.25,-4.05) 23(0.75,-4.05) 24(1.25,-4.05) 25(1.75,-4.05) 26(2.25,-4.05) 27(2.75,-4.05) 28(3.25,-4.05) 43(3.25,4.05) 44(2.75,4.05) 45(2.25,4.05) 46(1.75,4.05) 47(1.25,4.05) 48(0.75,4.05) 49(0.25,4.05) 50(-0.25,4.05) 51(-0.75,4.05) 52(-1.25,4.05) 53(-1.75,4.05) 54(-2.25,4.05) 55(-2.75,4.05) 56(-3.25,4.05)
  rect 5x5 smd: 57(0,0)
  silkscreen extent -5.1,-5 5.1,5, body extent -3.9,-3.9 3.9,3.9, height 1
CRY_4PIN_50M [mm] "50MHz"
  rect 1.6x1.7 smd: 1(0,0) 2(4.9,0) 3(4.9,5) 4(0,5)
  silkscreen extent -1.4,-0.1 6.2,5
DSUB1.385-2H9 [mm] "Connector; D Subminiature; 9 Position; Right Angle; Pitch 1.385 mm"
  rect 1.69x1.69 hole 1.09: 1(-5.54,-10.92)
  round 1.69 hole 1.09: 2(-2.77,-10.92) 3(0,-10.92) 4(2.77,-10.92) 5(5.54,-10.92) 6(-4.155,-8.08) 7(-1.385,-8.08) 8(1.385,-8.08) 9(4.155,-8.08)
  round 4.76 hole 3.26: 10(-12.495,-9.5) 11(12.495,-9.5)
  silkscreen extent -15.4,-12.4 15.4,6
HDR1X3 [mm] "Connector; Header; 3 Position"
  rect 1.5x1.5 hole 0.9: 1(0,0)
  round 1.5 hole 0.9: 2(2.54,0) 3(5.08,0)
  silkscreen extent -1.27,-1.27 6.35,1.27
HDR1X5 [mm] "Connector; Header; 5 Position"
  rect 1.5x1.5 hole 0.9: 1(0,0)
  round 1.5 hole 0.9: 2(2.54,0) 3(5.08,0) 4(7.62,0) 5(10.16,0)
  silkscreen extent -1.27,-1.27 11.43,1.27
HDR1X16 [mm] "Connector; Header; 16 Position"
  rect 1.5x1.5 hole 0.9: 1(0,0)
  round 1.5 hole 0.9: 2(2.54,0) 3(5.08,0) 4(7.62,0) 5(10.16,0) 6(12.7,0) 7(15.24,0) 8(17.78,0) 9(20.32,0) 10(22.86,0) 11(25.4,0) 12(27.94,0) 13(30.48,0) 14(33.02,0) 15(35.56,0) 16(38.1,0)
  silkscreen extent -1.27,-1.27 39.37,1.27
IF_KLD-0202 [mm] "DC Power Jack, 2.5mm, KLD Series, PCB Mount"
  oval 2x4.5 all layers, no hole: 1(13.7,0)
  round 1.5 hole 1: 1A(13.7,-1.25) 1B(13.7,1.25) 2A(7.5,-1) 2B(7.5,1) 3A(9.5,-5) 3B(11.5,-5)
  oval 2x4 all layers, no hole: 2(7.5,0)
  oval 4x2 all layers, no hole: 3(10.5,-5)
  silkscreen extent 0,-4.5 15,4.5
MYTP [mm]
  round 1.2 hole 0.8: 1(0,0)
  silkscreen extent -1,-1 1,1
NSO16 [mm]
  rect 0.6x2.2 smd: 1(-4.453,-2.61) 2(-3.183,-2.61) 3(-1.913,-2.61) 4(-0.643,-2.61) 5(0.627,-2.61) 6(1.897,-2.61) 7(3.167,-2.61) 8(4.437,-2.61) 9(4.437,2.59) 10(3.167,2.59) 11(1.897,2.59) 12(0.627,2.59) 13(-0.643,2.59) 14(-1.913,2.59) 15(-3.183,2.59) 16(-4.453,2.59)
  silkscreen extent -5.43,-2.73 4.99,1.09
PQG208_N [mm] "Shrink QFP, 208-Leads, Body 28x28mm, Pitch 0.5mm, IPC Medium Density"
  oval 1.8x0.3 smd: 1(-14.85,12.75) 2(-14.85,12.25) 3(-14.85,11.75) 4(-14.85,11.25) 5(-14.85,10.75) 6(-14.85,10.25) 7(-14.85,9.75) 8(-14.85,9.25) 9(-14.85,8.75) 10(-14.85,8.25) 11(-14.85,7.75) 12(-14.85,7.25) 13(-14.85,6.75) 14(-14.85,6.25) 15(-14.85,5.75) 16(-14.85,5.25) 17(-14.85,4.75) 18(-14.85,4.25) 19(-14.85,3.75) 20(-14.85,3.25) 21(-14.85,2.75) 22(-14.85,2.25) 23(-14.85,1.75) 24(-14.85,1.25) 25(-14.85,0.75) 26(-14.85,0.25) 27(-14.85,-0.25) 28(-14.85,-0.75) 29(-14.85,-1.25) 30(-14.85,-1.75) 31(-14.85,-2.25) 32(-14.85,-2.75) 33(-14.85,-3.25) 34(-14.85,-3.75) 35(-14.85,-4.25) 36(-14.85,-4.75) 37(-14.85,-5.25) 38(-14.85,-5.75) 39(-14.85,-6.25) 40(-14.85,-6.75) 41(-14.85,-7.25) 42(-14.85,-7.75) 43(-14.85,-8.25) 44(-14.85,-8.75) 45(-14.85,-9.25) 46(-14.85,-9.75) 47(-14.85,-10.25) 48(-14.85,-10.75) 49(-14.85,-11.25) 50(-14.85,-11.75) 51(-14.85,-12.25) 52(-14.85,-12.75) 105(14.85,-12.75) 106(14.85,-12.25) 107(14.85,-11.75) 108(14.85,-11.25) 109(14.85,-10.75) 110(14.85,-10.25) 111(14.85,-9.75) 112(14.85,-9.25) 113(14.85,-8.75) 114(14.85,-8.25) 115(14.85,-7.75) 116(14.85,-7.25) 117(14.85,-6.75) 118(14.85,-6.25) 119(14.85,-5.75) 120(14.85,-5.25) 121(14.85,-4.75) 122(14.85,-4.25) 123(14.85,-3.75) 124(14.85,-3.25) 125(14.85,-2.75) 126(14.85,-2.25) 127(14.85,-1.75) 128(14.85,-1.25) 129(14.85,-0.75) 130(14.85,-0.25) 131(14.85,0.25) 132(14.85,0.75) 133(14.85,1.25) 134(14.85,1.75) 135(14.85,2.25) 136(14.85,2.75) 137(14.85,3.25) 138(14.85,3.75) 139(14.85,4.25) 140(14.85,4.75) 141(14.85,5.25) 142(14.85,5.75) 143(14.85,6.25) 144(14.85,6.75) 145(14.85,7.25) 146(14.85,7.75) 147(14.85,8.25) 148(14.85,8.75) 149(14.85,9.25) 150(14.85,9.75) 151(14.85,10.25) 152(14.85,10.75) 153(14.85,11.25) 154(14.85,11.75) 155(14.85,12.25) 156(14.85,12.75)
  oval 0.3x1.8 smd: 53(-12.75,-14.85) 54(-12.25,-14.85) 55(-11.75,-14.85) 56(-11.25,-14.85) 57(-10.75,-14.85) 58(-10.25,-14.85) 59(-9.75,-14.85) 60(-9.25,-14.85) 61(-8.75,-14.85) 62(-8.25,-14.85) 63(-7.75,-14.85) 64(-7.25,-14.85) 65(-6.75,-14.85) 66(-6.25,-14.85) 67(-5.75,-14.85) 68(-5.25,-14.85) 69(-4.75,-14.85) 70(-4.25,-14.85) 71(-3.75,-14.85) 72(-3.25,-14.85) 73(-2.75,-14.85) 74(-2.25,-14.85) 75(-1.75,-14.85) 76(-1.25,-14.85) 77(-0.75,-14.85) 78(-0.25,-14.85) 79(0.25,-14.85) 80(0.75,-14.85) 81(1.25,-14.85) 82(1.75,-14.85) 83(2.25,-14.85) 84(2.75,-14.85) 85(3.25,-14.85) 86(3.75,-14.85) 87(4.25,-14.85) 88(4.75,-14.85) 89(5.25,-14.85) 90(5.75,-14.85) 91(6.25,-14.85) 92(6.75,-14.85) 93(7.25,-14.85) 94(7.75,-14.85) 95(8.25,-14.85) 96(8.75,-14.85) 97(9.25,-14.85) 98(9.75,-14.85) 99(10.25,-14.85) 100(10.75,-14.85) 101(11.25,-14.85) 102(11.75,-14.85) 103(12.25,-14.85) 104(12.75,-14.85) 157(12.75,14.85) 158(12.25,14.85) 159(11.75,14.85) 160(11.25,14.85) 161(10.75,14.85) 162(10.25,14.85) 163(9.75,14.85) 164(9.25,14.85) 165(8.75,14.85) 166(8.25,14.85) 167(7.75,14.85) 168(7.25,14.85) 169(6.75,14.85) 170(6.25,14.85) 171(5.75,14.85) 172(5.25,14.85) 173(4.75,14.85) 174(4.25,14.85) 175(3.75,14.85) 176(3.25,14.85) 177(2.75,14.85) 178(2.25,14.85) 179(1.75,14.85) 180(1.25,14.85) 181(0.75,14.85) 182(0.25,14.85) 183(-0.25,14.85) 184(-0.75,14.85) 185(-1.25,14.85) 186(-1.75,14.85) 187(-2.25,14.85) 188(-2.75,14.85) 189(-3.25,14.85) 190(-3.75,14.85) 191(-4.25,14.85) 192(-4.75,14.85) 193(-5.25,14.85) 194(-5.75,14.85) 195(-6.25,14.85) 196(-6.75,14.85) 197(-7.25,14.85) 198(-7.75,14.85) 199(-8.25,14.85) 200(-8.75,14.85) 201(-9.25,14.85) 202(-9.75,14.85) 203(-10.25,14.85) 204(-10.75,14.85) 205(-11.25,14.85) 206(-11.75,14.85) 207(-12.25,14.85) 208(-12.75,14.85)
  silkscreen extent -14.97,-13.55 13.55,13.57, body extent -14,-14 14,14, height 4.1
PUSHBUTTONSW [mil] "PUSHBUTTONSW"
  rect 18x40 smd: " "(-99.41,0) " "(99.41,0)
  rect 24x40 smd: A(-72.83,86.61) AA(-72.83,-86.61) B(72.83,86.61) BB(72.83,-86.61)
  silkscreen extent -126,-126 126,126
RES-ADJ [mil]
  round 60 hole 31.5: 1(-100,0) 2(100,0) 3(0,0)
  silkscreen extent -189,-91 189,91
SMB_V-RJ45 [mm] "Connector; SMB Straight"
  round 2.5 hole 1.5: 1(0,0) 2(-2.5,-2.5) 2(-2.5,2.5) 2(2.5,-2.5) 2(2.5,2.5)
  silkscreen extent -3.15,-3.15 3.15,3.15
SMBJ10A_DIOM4336X24N [mm] "Molded Diode, 2-Leads, Body 4.3x3.6mm, IPC Medium Density"
  rect 2.45x2.05 smd: 1(-1.575,0) 2(1.575,0)
  silkscreen extent -3.07,-1.95 2.3,1.95, body extent -2.29,-1.91 2.28,1.91, height 2.44
SOIC127P600X175-8N [mm] "SOIC, 8-Leads, Body 5.0x4.0mm (max), Pitch 1.27mm, IPC Medium Density"
  oval 2.2x0.6 smd: 1(-2.4,1.905) 2(-2.4,0.635) 3(-2.4,-0.635) 4(-2.4,-1.905) 5(2.4,-1.905) 6(2.4,-0.635) 7(2.4,0.635) 8(2.4,1.905)
  silkscreen extent -2.52,-2.5 0.9,2.88, body extent -2,-2.5 2,2.5, height 1.75
SOT23D [mm] "TSOP, 8-Leads, Body 2.9x1.6mm (max), Pitch 0.65mm, IPC Medium Density"
  rect 1.45x0.3 smd: 1(-1.3,0.975) 2(-1.3,0.325) 3(-1.3,-0.325) 4(-1.3,-0.975) 5(1.3,-0.975) 6(1.3,-0.325) 7(1.3,0.325) 8(1.3,0.975)
  silkscreen extent -2.95,-1.6 2.4,1.6, body extent -0.8,-1.45 0.8,1.45, height 1.45
SOT143 [mm]
  rect 1.35x1.35 smd: 1(-0.744,-1.108)
  rect 0.9x1.35 smd: 2(0.956,-1.108) 3(0.956,1.092) 4(-0.944,1.092)
  silkscreen extent -2.2,-3.1 2.2,2.2
SOT223P700X180-4N [mm] "SOT223, 4-Leads, Body 6.7x7.3mm (max), Pitch 2.30mm, IPC Medium Density"
  rect 2.4x0.95 smd: 1(-2.9,2.3) 2(-2.9,0) 3(-2.9,-2.3)
  rect 2.4x3.3 smd: 4(2.9,0)
  silkscreen extent -3.02,-3.35 1.3,3.45, body extent -1.86,-3.35 1.86,3.35, height 1.8
SOT-223(FAN1112) [mm] "SOT223, 4-Leads, Body 6.7x7.3mm (max), Pitch 2.29mm, IPC Medium Density"
  rect 2.1x0.95 smd: 1(-3.05,2.29) 2(-3.05,0) 3(-3.05,-2.29)
  rect 2.1x3.3 smd: 4(3.05,0)
  silkscreen extent -3.17,-3.35 1.6,3.44
SW_SD12D09 [mm]
  round 1.2 hole 0.6: 1(-2,0) 2(0,0) 3(2,0.1)
  silkscreen extent -4.5,-2.5 4.5,2.6
TO-263-3SMD [mil]
  oct 70.83x156.67 smd: 1(0,0)
  oval 70.83x156.67 smd: 2(100,0) 3(200,0)
  rect 420x390 smd: 4(100,320)
  silkscreen extent -126,-95 326,534
TSOP65P640X120-16N [mm] "TSOP, 16-Leads, Body 5.1x4.5mm (max), Pitch 0.65mm, IPC Medium Density"
  oval 1.55x0.35 smd: 1(-2.875,2.275) 2(-2.875,1.625) 3(-2.875,0.975) 4(-2.875,0.325) 5(-2.875,-0.325) 6(-2.875,-0.975) 7(-2.875,-1.625) 8(-2.875,-2.275) 9(2.875,-2.275) 10(2.875,-1.625) 11(2.875,-0.975) 12(2.875,-0.325) 13(2.875,0.325) 14(2.875,0.975) 15(2.875,1.625) 16(2.875,2.275)
  silkscreen extent -3,-2.55 1.7,3.12, body extent -2.25,-2.55 2.25,2.55, height 1.2
TSSOP50P810X120-48N [mm] "TSSOP, 48-Leads, Body 12.6x6.2mm (max), Pitch 0.50mm, IPC Medium Density"
  oval 1.75x0.3 smd: 1(-3.625,5.75) 2(-3.625,5.25) 3(-3.625,4.75) 4(-3.625,4.25) 5(-3.625,3.75) 6(-3.625,3.25) 7(-3.625,2.75) 8(-3.625,2.25) 9(-3.625,1.75) 10(-3.625,1.25) 11(-3.625,0.75) 12(-3.625,0.25) 13(-3.625,-0.25) 14(-3.625,-0.75) 15(-3.625,-1.25) 16(-3.625,-1.75) 17(-3.625,-2.25) 18(-3.625,-2.75) 19(-3.625,-3.25) 20(-3.625,-3.75) 21(-3.625,-4.25) 22(-3.625,-4.75) 23(-3.625,-5.25) 24(-3.625,-5.75) 25(3.625,-5.75) 26(3.625,-5.25) 27(3.625,-4.75) 28(3.625,-4.25) 29(3.625,-3.75) 30(3.625,-3.25) 31(3.625,-2.75) 32(3.625,-2.25) 33(3.625,-1.75) 34(3.625,-1.25) 35(3.625,-0.75) 36(3.625,-0.25) 37(3.625,0.25) 38(3.625,0.75) 39(3.625,1.25) 40(3.625,1.75) 41(3.625,2.25) 42(3.625,2.75) 43(3.625,3.25) 44(3.625,3.75) 45(3.625,4.25) 46(3.625,4.75) 47(3.625,5.25) 48(3.625,5.75)
  silkscreen extent -3.75,-6.3 2.35,6.57, body extent -3.1,-6.3 3.1,6.3, height 1.2
XTAL_DIP [mil]
  round 62 hole 28: 1(-100,0) 2(100,0)
  silkscreen extent -216,-91 216,91